# Altium PCB main.PcbDoc
Units mil, origin at the board's own origin, x right, y up, seen from the top; angles counter-clockwise.
Board outline 1328.74 x 1781.5 mil, 4 copper layers (Layer 1, Layer 2, Layer 3, Layer 4), stack 22.378 mil thick; 84 components, 60 nets, 280 pads, 40 vias.
Unrouted connection lines stored in the file: 90.
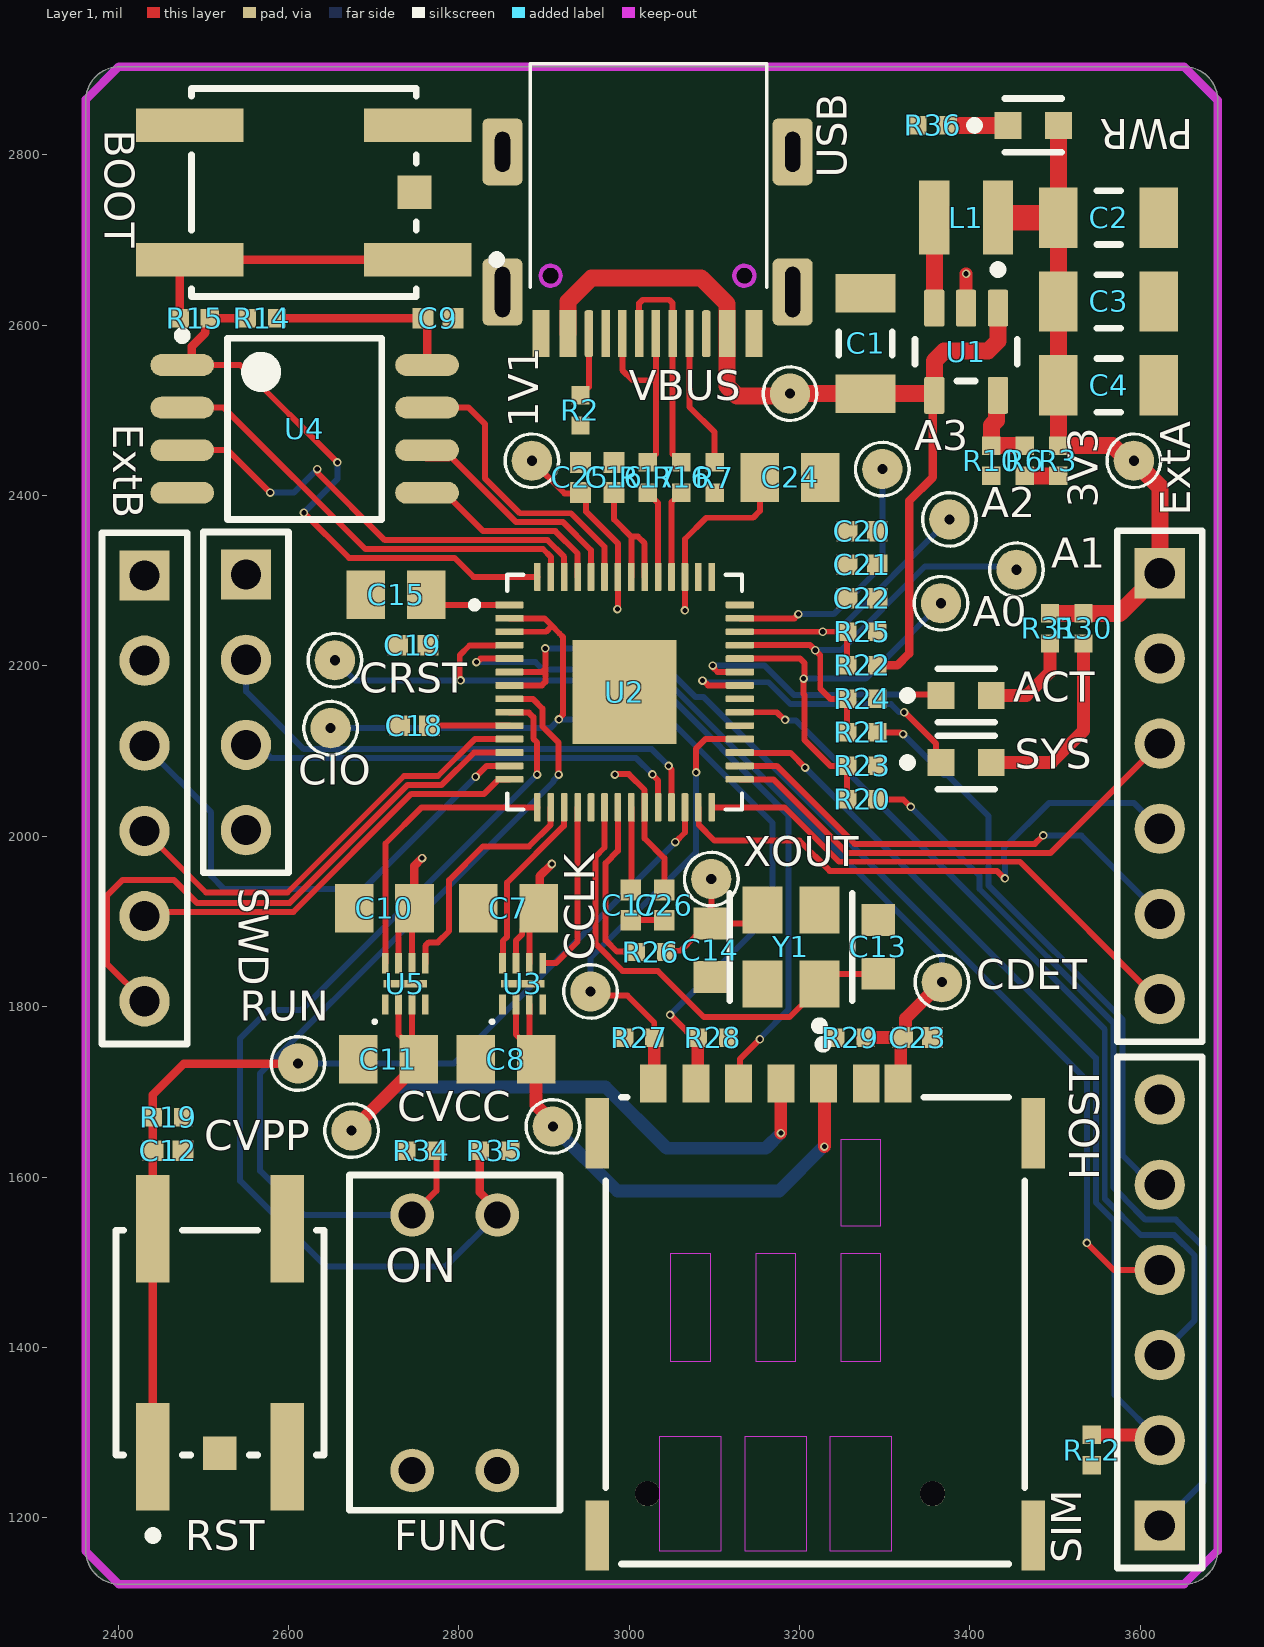
[diagram p0: Layer 1 view]
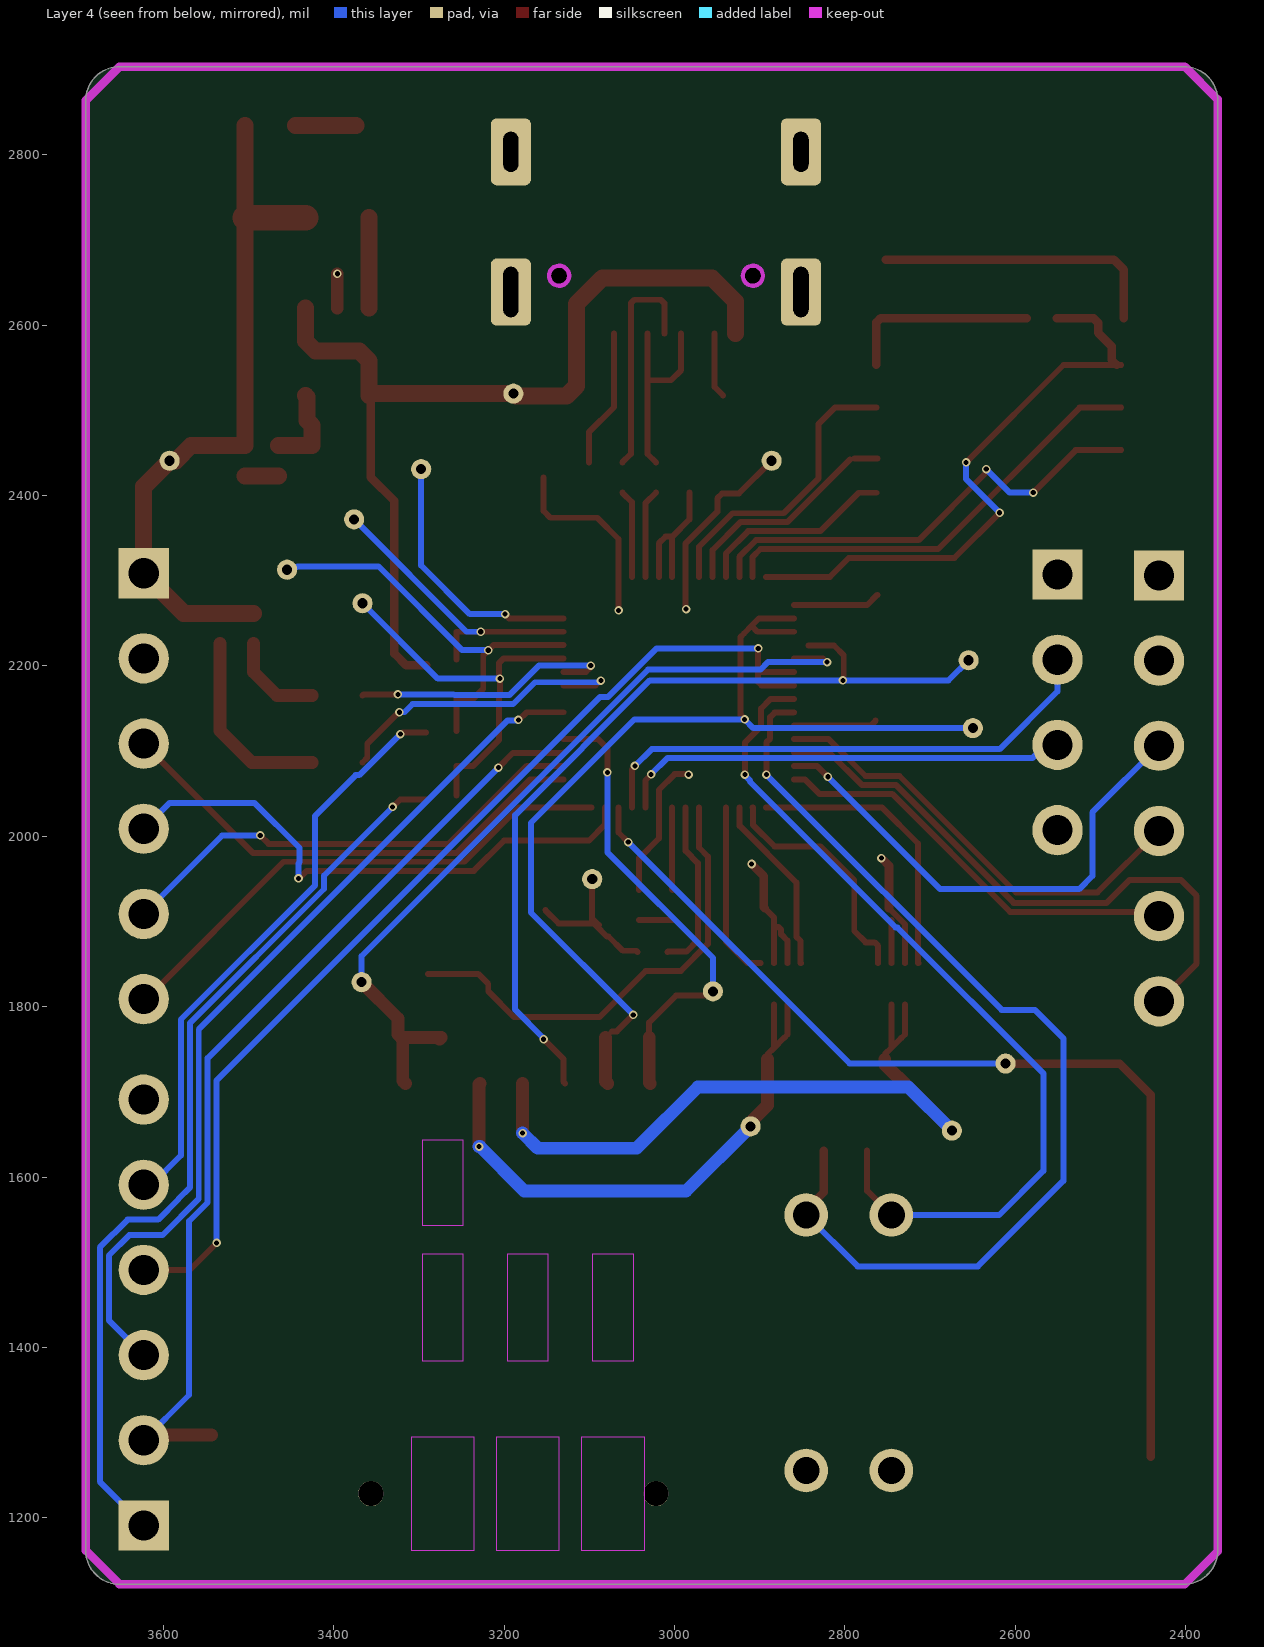
[diagram p1: Layer 4 view, seen from below]
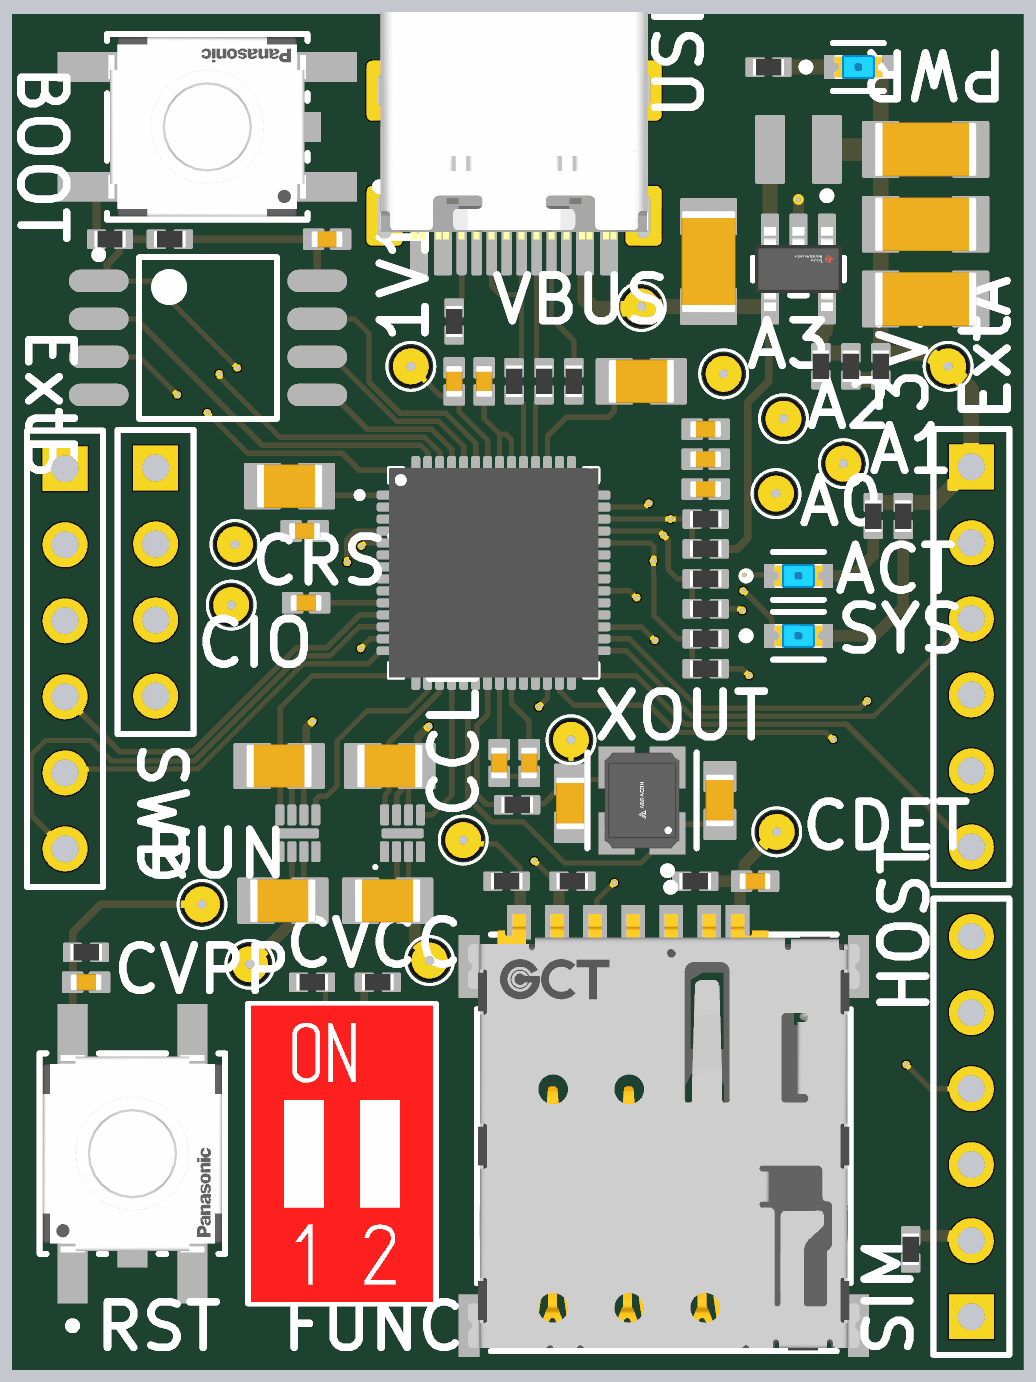
[diagram p2: 3D render of the assembled board from above, using the file's embedded part models]

## Layer stack, top to bottom
Top Solder: solder mask 0.4, Solder Resist, Dk 3.5
Layer 1: signal copper 1.4
Dielectric 2: prepreg 2.8, FR-4, Dk 4.1
Layer 2: signal copper 0.689
Dielectric 1: dielectric 12.6, FR-4, Dk 4.8
Layer 3: signal copper 0.689
Dielectric 5: prepreg 2.8, FR-4, Dk 4.1
Layer 4: signal copper 1.4
Bottom Solder: solder mask 0.4, Solder Resist, Dk 3.5

## Board outline
2362.2,1161.42 2362.2,2864.17 cw(c2401.57,2864.17) 2401.57,2903.54 3651.57,2903.54 cw(c3651.57,2864.17) 3690.94,2864.17 3690.94,1161.42 cw(c3651.57,1161.42) 3651.57,1122.05 2401.57,1122.05 cw(c2401.57,1161.42)

## Design rules (kind name [scope] priority, off if disabled: settings)
Clearance [All] p1: gap=7.87 ignorepadtopadclearanceinfootprint=TRUE except(3.5: Arc-Arc Arc-Track Track-Track; 10: Arc-Via Track-Via; 13: Arc-Hole Track-Hole SMDPad-Hole THPad-Hole Via-Hole Fill-Hole Poly-Hole Region-Hole)
DiffPairsRouting [All] p1: maxlimit=10 minlimit=3.5 mostfreqgap=10 toplayer_minwidth=3.5 toplayer_maxwidth=15 toplayer_prefwidth=15 midlayer1_minwidth=3.5 midlayer1_maxwidth=15 midlayer1_prefwidth=15 midlayer2_minwidth=3.5 midlayer2_maxwidth=15 midlayer2_prefwidth=15 bottomlayer_minwidth=3.5 bottomlayer_maxwidth=15 bottomlayer_prefwidth=15 maxuncoupledlength=500
HoleSize [All] p1: absolutevalues=TRUE maxlimit=248.03 minlimit=5.91 maxpercent=80.000 minpercent=20.000
HoleToHoleClearance [All] p1: gap=19.68 allowstackedmicrovias=TRUE
MinimumSolderMaskSliver [All] p1: minsoldermaskwidth=7.87
PasteMaskExpansion [All] p1: expansion=1.97
PlaneClearance [All] p1: clearance=7.87
PlaneConnect [All] p1: planeconnectstyle=Direct reliefexpansion=20 reliefentries=4 reliefconductorwidth=10 reliefairgap=10
PolygonConnect [All] p1: connectstyle=Direct reliefconductorwidth=10 reliefentries=4 polygonreliefangle="90 Angle" airgapwidth=10
RoutingCorners [All] p1: cornerstyle=Round minsetback=100 maxsetback=100
RoutingVias [All] p1: holewidth=10 width=20 viastyle="Through Hole" minholewidth=5.91 minwidth=9.84 maxholewidth=248.03 maxwidth=300
SilkToSilkClearance [All] p1: silktosilkclearance=0
SilkToSolderMaskClearance [IsPad] p1: minsilkscreentomaskgap=5.91 clearancetoexposedcopper=TRUE
SolderMaskExpansion [All] p1: expansion=1.97 istentingtop=FALSE
Width [All] p1: maxlimit=200 minlimit=3.5 preferedwidth=10
20 further rules are at their usual default settings.

## Classes and differential pairs
differential pair USB: +USB_P -USB_N

## Components (designator, comment, footprint, x,y, rotation, side; value= is the part's Value field where it differs from the comment)
1V1 "TestPin 1.2R 0.3R" TestPin_1.2R_0.3R 2885.83,2440.94 r0 top
3V3 "TestPin 1.2R 0.3R" TestPin_1.2R_0.3R 3592.52,2440.94 r90 top
A0 "TestPin 1.2R 0.3R" TestPin_1.2R_0.3R 3366.14,2273.62 r90 top
A1 "TestPin 1.2R 0.3R" TestPin_1.2R_0.3R 3454.72,2312.99 r90 top
A2 "TestPin 1.2R 0.3R" TestPin_1.2R_0.3R 3375.98,2372.05 r90 top
A3 "TestPin 1.2R 0.3R" TestPin_1.2R_0.3R 3297.24,2431.1 r0 top
ACT "LTST-C191TBKT" FP-LTST-C191TBKT-MFG 3395.67,2165.35 r0 top (schematic designator D2)
BOOT "EVQ-Q2H03W" FP-EVQ-Q2H03W-MFG 2618.11,2755.91 r180 top locked (schematic designator SW1)
C1 "C1206_4u7" C1206 3277.56,2578.74 r90 top locked value=4u7
C2 "C1206_10u" C1206 3562.99,2726.38 r0 top locked value=10u
C3 "C1206_10u" C1206 3562.99,2627.95 r0 top locked value=10u
C4 "C1206_10u" C1206 3562.99,2529.53 r0 top locked value=10u
C7 "C0805_1u" C0805 2858.27,1915.35 r180 top value=1u
C8 "C0805_1u" C0805 2855.32,1738.19 r180 top value=1u
C9 "C0402_100n" C0402 2775.59,2608.27 r0 top value=100n
C10 "C0805_1u" C0805 2712.6,1915.35 r180 top value=1u
C11 "C0805_1u" C0805 2717.52,1738.19 r180 top value=1u
C12 "C0402_100n" C0402 2458.66,1630.91 r0 top value=100n
C13 "C0603_15p" C0603 3292.32,1870.08 r90 top locked value=15p
C14 "C0603_15p" C0603 3095.47,1866.14 r270 top locked value=15p
C15 "C0805_1u" C0805 2726.38,2283.46 r180 top value=1u
C16 "C0402_100n" C0402 2982.28,2421.26 r90 top value=100n
C17 "C0402_100n" C0402 3001.97,1919.29 r270 top value=100n
C18 "C0402_100n" C0402 2748.03,2129.92 r180 top value=100n
C19 "C0402_100n" C0402 2746.06,2224.41 r180 top value=100n
C20 "C0402_100n" C0402 3273.62,2358.27 r0 top value=100n
C21 "C0402_100n" C0402 3273.62,2318.9 r0 top value=100n
C22 "C0402_100n" C0402 3273.62,2279.53 r0 top value=100n
C23 "C0402_100n" C0402 3338.58,1763.78 r0 top value=100n
C24 "C0805_1u" C0805 3188.98,2421.26 r0 top value=1u
C25 "C0402_100n" C0402 2942.91,2421.26 r90 top value=100n
C26 "C0402_100n" C0402 3041.34,1919.29 r270 top value=100n
CCLK "TestPin 1.2R 0.3R" TestPin_1.2R_0.3R 2954.72,1817.91 r90 top
CDET "TestPin 1.2R 0.3R" TestPin_1.2R_0.3R 3367.13,1828.74 r180 top
CIO "TestPin 1.2R 0.3R" TestPin_1.2R_0.3R 2649.61,2126.97 r180 top
CRST "TestPin 1.2R 0.3R" TestPin_1.2R_0.3R 2654.53,2206.69 r90 top
CVCC "TestPin 1.2R 0.3R" TestPin_1.2R_0.3R 2910.43,1659.45 r90 top
CVPP "TestPin 1.2R 0.3R" TestPin_1.2R_0.3R 2674.21,1654.53 r90 top
ExtA "Header 6" HDR1X6 3623.03,2308.86 r270 top locked (schematic designator P3)
ExtB "Header 6" HDR1X6 2431.1,2306.3 r270 top locked (schematic designator P4)
FUNC "418117270902" 418117270902 2795.28,1405.51 r0 top locked (schematic designator SW3)
HOST "Header 6" HDR1X6 3623.03,1190.94 r90 top locked (schematic designator P2)
L1 "252010CDMCDDS-2R2MC" INDC2520X10N 3395.67,2726.38 r0 top locked
PWR "LTST-C191TBKT" FP-LTST-C191TBKT-MFG 3474.41,2834.65 r0 top (schematic designator D5)
R2 "R0402_5k1" R0402 2942.91,2500 r270 top value=5k1
R3 "R0402_430k" R0402 3503.94,2440.94 r90 top value=430k
R6 "R0402_12k" R0402 3464.57,2440.94 r270 top value=12k
R7 "R0402_5k1" R0402 3100.39,2421.26 r270 top value=5k1
R10 "R0402_100k" R0402 3425.2,2440.94 r90 top value=100k
R12 "R0402_100k" R0402 3543.31,1279.53 r90 top value=100k
R14 "R0402" R0402 2568.9,2608.27 r180 top value=_
R15 "R0402_1k0" R0402 2490.16,2608.27 r180 top value=1k0
R16 "R0402_27R" R0402 3061.02,2421.26 r90 top value=27R
R17 "R0402_27R" R0402 3021.65,2421.26 r90 top value=27R
R19 "R0402_10k" R0402 2458.66,1670.28 r180 top value=10k
R20 "R0402_100k" R0402 3273.62,2043.31 r0 top value=100k
R21 "R0402_100k" R0402 3273.62,2122.05 r0 top value=100k
R22 "R0402_100k" R0402 3273.62,2200.79 r0 top value=100k
R23 "R0402_100k" R0402 3273.62,2082.68 r180 top value=100k
R24 "R0402_100k" R0402 3273.62,2161.42 r180 top value=100k
R25 "R0402_100k" R0402 3273.62,2240.16 r180 top value=100k
R26 "R0402_1k0" R0402 3025.59,1864.17 r180 top locked value=1k0
R27 "R0402_100k" R0402 3011.81,1763.78 r180 top value=100k
R28 "R0402_100k" R0402 3098.43,1763.78 r0 top value=100k
R29 "R0402_47k" R0402 3259.84,1763.78 r180 top value=47k
R30 "R0402_150R" R0402 3533.46,2244.09 r90 top value=150R
R31 "R0402_150R" R0402 3494.09,2244.09 r90 top value=150R
R34 "R0402_10k" R0402 2755.91,1630.91 r180 top value=10k
R35 "R0402_10k" R0402 2842.52,1630.91 r0 top value=10k
R36 "R0402_150R" R0402 3356.3,2834.65 r0 top value=150R
RST "EVQ-Q2H03W" FP-EVQ-Q2H03W-MFG 2519.69,1405.51 r90 top locked (schematic designator SW2)
RUN "TestPin 1.2R 0.3R" TestPin_1.2R_0.3R 2611.22,1733.27 r90 top
SIM "SIM8066-6-1-14-01-A" FP-SIM8066-6-1-14-01-A-MFG 3218.5,1419.68 r0 top locked (schematic designator J3)
SWD "Header 4" HDR1X4 2550.2,2307.28 r270 top locked (schematic designator P1)
SYS "LTST-C191TBKT" FP-LTST-C191TBKT-MFG 3395.67,2086.61 r0 top (schematic designator D1)
U1 "TLV62569DBVR" FP-DBV0005A-MFG 3395.67,2568.9 r270 top locked
U2 "RP2040" QFN40P700X700X90-57N 2994.69,2169.29 r0 top locked
U3 "AP7345D-1833RH4-7" SON127P600-8N 2875,1826.77 r90 top
U4 "W25Q16DVSSIG" WINB-W25Q16DVSSIG-8_M 2619.09,2478.35 r0 top locked
U5 "AP7345D-1833RH4-7" SON127P600-8N 2737.2,1826.77 r90 top
USB "Type_C_16P" Type_C_16P 3021.65,2696.85 r90 top locked (schematic designator J2)
VBUS "TestPin 1.2R 0.3R" TestPin_1.2R_0.3R 3188.98,2519.68 r90 top
XOUT "TestPin 1.2R 0.3R" TestPin_1.2R_0.3R 3096.46,1949.8 r0 top
Y1 "ABM8G-12.000MHZ-B4Y-T" FP-ABM8G-MFG 3189.96,1870.08 r90 top locked

## Footprints (in the part's own frame and the unit in brackets; to place one, negate y for a bottom-side part, rotate by r counter-clockwise, add the part's x,y. Pads: shape width x height; smd on the part's side, far side on the other; paste and mask are expansions set on the pad)
418117270902 [mm] "2.54 mm compact THT with raised actuator, 2p"
  round 1.3 hole 0.8: 1(-1.27,-3.81) 2(1.27,-3.81) 3(1.27,3.81) 4(-1.27,3.81)
  silkscreen extent -3.14,-5 3.14,5, body extent -3.04,-4.95 3.04,4.95, height 6.9
C0402 [mm]
  rect 0.62x0.62 smd: 1(-0.45,0) 2(0.45,0)
  body extent -0.53,-0.28 0.53,0.28, height 0.6
C0603 [mm]
  rect 0.95x1 smd: 1(-0.8,0) 2(0.8,0)
  body extent -0.87,-0.48 0.87,0.48, height 0.7
C0805 [mm]
  rect 1.15x1.45 smd: 1(-0.9,0) 2(0.9,0)
  body extent -1.1,-0.72 1.1,0.72, height 0.9
C1206 [mm]
  rect 1.15x1.8 smd: 1(-1.5,0) 2(1.5,0)
  silkscreen extent -0.35,-0.8 0.35,0.8, body extent -1.7,-0.9 1.7,0.9, height 1
FP-ABM8G-MFG [mm]
  rect 1.4x1.2 smd paste+0 mask+0: 1(-1.1,-0.85) 2(1.1,-0.85) 3(1.1,0.85) 4(-1.1,0.85)
  silkscreen extent -2.47,-1.83 1.6,1.83, body extent -1.9,-1.55 1.9,1.55, height 0.25
FP-DBV0005A-MFG [mm]
  rrect17% 1.1x0.6 smd paste+0 mask+0: 1(-1.3,0.95) 2(-1.3,0) 3(-1.3,-0.95) 4(1.3,-0.95) 5(1.3,0.95)
  silkscreen extent -2.57,-1.53 0.87,1.53, body extent -1.95,-1.78 1.95,1.78, height 0.25
FP-EVQ-Q2H03W-MFG [mm]
  rect 1x1 smd paste+0 mask+0: 1(-3.3,0)
  rect 3.2x1 smd paste+0 mask+0: A(-3.4,2) A'(3.4,2) B(-3.4,-2) B'(3.4,-2)
  silkscreen extent -5.88,-3.1 3.35,3.1, body extent -5.1,-3.2 5.1,3.2, height 0.25
FP-LTST-C191TBKT-MFG [mm]
  rect 0.8x0.8 smd paste+0 mask+0: 1(-0.75,0) 2(0.75,0)
  silkscreen extent -1.87,-0.8 0.85,0.8, body extent -1.25,-0.55 1.25,0.55, height 0.25
FP-SIM8066-6-1-14-01-A-MFG [mm]
  rect 0.7x2.1 smd paste+0 mask+0: 1(-6.5,5.89) 2(6.5,5.89) 3(-6.5,-6.11) 4(6.5,-6.11)
  rect 0.8x1.14 smd paste+0 mask+0: C1(0.25,7.37) C2(-2.29,7.37) C3(-4.83,7.37) C5(1.52,7.37) C6(-1.02,7.37) C7(-3.56,7.37) CD(2.47,7.37)
  round 0.75 hole 0.75 unplated paste-1000 mask+0: ""(-5,-4.86) ""(3.5,-4.86)
  Keep-Out Layer region: 0.76,3.135 1.96,3.135 1.96,5.685 0.76,5.685
  Keep-Out Layer region: 0.76,-0.915 1.96,-0.915 1.96,2.295 0.76,2.295
  Keep-Out Layer region: -1.78,-0.915 -0.58,-0.915 -0.58,2.295 -1.78,2.295
  Keep-Out Layer region: -4.32,-0.915 -3.12,-0.915 -3.12,2.295 -4.32,2.295
  Keep-Out Layer region: -4.645,-6.56 -2.795,-6.56 -2.795,-3.16 -4.645,-3.16
  Keep-Out Layer region: -2.105,-6.56 -0.255,-6.56 -0.255,-3.16 -2.105,-3.16
  Keep-Out Layer region: 0.435,-6.56 2.285,-6.56 2.285,-3.16 0.435,-3.16
  silkscreen extent -6.24,-6.96 6.24,8.66, body extent -6.95,-7.26 6.95,8.04, height 0.25
HDR1X4 [mm] "Connector; Header; 4 Position"
  rect 1.5x1.5 hole 0.9: 1(0,0)
  round 1.5 hole 0.9: 2(2.54,0) 3(5.08,0) 4(7.62,0)
  silkscreen extent -1.27,-1.27 8.89,1.27
HDR1X6 [mm] "Connector; Header; 6 Position"
  rect 1.5x1.5 hole 0.9: 1(0,0)
  round 1.5 hole 0.9: 2(2.54,0) 3(5.08,0) 4(7.62,0) 5(10.16,0) 6(12.7,0)
  silkscreen extent -1.27,-1.27 13.97,1.27
INDC2520X10N [mm] "Chip Inductor, 2-Leads, Body 2.50x2.00mm, IPC Medium Density"
  rect 0.9x2.2 smd: 1(-0.95,0) 2(0.95,0)
  body extent -1.35,-1.1 1.35,1.1, height 1
QFN40P700X700X90-57N [mm]
  rrect25% 0.84x0.2 smd: 1(-3.435,2.6) 2(-3.435,2.2) 3(-3.435,1.8) 4(-3.435,1.4) 5(-3.435,1) 6(-3.435,0.6) 7(-3.435,0.2) 8(-3.435,-0.2) 9(-3.435,-0.6) 10(-3.435,-1) 11(-3.435,-1.4) 12(-3.435,-1.8) 13(-3.435,-2.2) 14(-3.435,-2.6) 29(3.435,-2.6) 30(3.435,-2.2) 31(3.435,-1.8) 32(3.435,-1.4) 33(3.435,-1) 34(3.435,-0.6) 35(3.435,-0.2) 36(3.435,0.2) 37(3.435,0.6) 38(3.435,1) 39(3.435,1.4) 40(3.435,1.8) 41(3.435,2.2) 42(3.435,2.6)
  rrect25% 0.2x0.84 smd: 15(-2.6,-3.435) 16(-2.2,-3.435) 17(-1.8,-3.435) 18(-1.4,-3.435) 19(-1,-3.435) 20(-0.6,-3.435) 21(-0.2,-3.435) 22(0.2,-3.435) 23(0.6,-3.435) 24(1,-3.435) 25(1.4,-3.435) 26(1.8,-3.435) 27(2.2,-3.435) 28(2.6,-3.435) 43(2.6,3.435) 44(2.2,3.435) 45(1.8,3.435) 46(1.4,3.435) 47(1,3.435) 48(0.6,3.435) 49(0.2,3.435) 50(-0.2,3.435) 51(-0.6,3.435) 52(-1,3.435) 53(-1.4,3.435) 54(-1.8,3.435) 55(-2.2,3.435) 56(-2.6,3.435)
  rect 3.1x3.1 smd paste-0.57: 57(0,0)
  silkscreen extent -4.57,-3.5 3.5,3.5, body extent -3.5,-3.5 3.5,3.5, height 0.9
R0402 [mm]
  rect 0.55x0.55 smd: 1(-0.45,0) 2(0.45,0)
  body extent -0.53,-0.28 0.53,0.28, height 0.4
SON127P600-8N [mm] "X2-DFN1612-8"
  rect 0.6x0.2 smd: 1(-0.615,0.6) 2(-0.615,0.2) 3(-0.615,-0.2) 4(-0.615,-0.6) 5(0.615,-0.6) 6(0.615,-0.2) 7(0.615,0.2) 8(0.615,0.6)
  rect 0.23x1.3 smd: 9(0,0)
  silkscreen extent -1.18,0.86 -1.08,0.96, body extent -0.63,-0.83 0.63,0.82, height 0.4
TestPin_1.2R_0.3R [mm]
  round 1.2 / inner round 1.2 / far side round 0.6 hole 0.3 mask+0.102: 0(0,0)
  silkscreen extent -0.8,-0.8 0.8,0.8
Type_C_16P [mm]
  rrect30% 2x1.2 hole 0.45 slot 1.5 at 0 deg: 0(-1.47,4.325) 0(-1.47,-4.325)
  rrect30% 2x1.2 hole 0.45 slot 1.2 at 0 deg: 0(2.71,4.325) 0(2.71,-4.325)
  rect 1.397x0.5 smd: A1B12(-2.71,-3.175) A4B9(-2.71,-2.375) A9B4(-2.71,2.375) A12B1(-2.71,3.175)
  rect 1.397x0.25 smd: A5(-2.71,-1.25) A6(-2.71,-0.25) A7(-2.71,0.25) A8(-2.71,1.25) B6(-2.71,0.75) B7(-2.71,-0.75)
  rrect50% 1.397x0.25 smd: B5(-2.71,1.75) B8(-2.71,-1.75)
  Keep-Out Layer board cut-out: -0.983,-2.587 -1.098,-2.61 -1.195,-2.675 -1.26,-2.773 -1.283,-2.887 -1.283,-2.887 -1.26,-3.002 -1.195,-3.1 -1.098,-3.165 -0.983,-3.187 -0.983,-3.187 -0.868,-3.165 -0.771,-3.1 -0.706,-3.002 -0.683,-2.887 -0.683,-2.887 -0.706,-2.773 -0.771,-2.675 -0.868,-2.61 -0.983,-2.587
  Keep-Out Layer board cut-out: -0.983,3.19 -1.098,3.168 -1.195,3.103 -1.26,3.005 -1.283,2.89 -1.283,2.89 -1.26,2.776 -1.195,2.678 -1.098,2.613 -0.983,2.59 -0.983,2.59 -0.868,2.613 -0.771,2.678 -0.706,2.776 -0.683,2.89 -0.683,2.89 -0.706,3.005 -0.771,3.103 -0.868,3.168 -0.983,3.19
  Keep-Out Layer circle w0.127: c-0.983,2.89 r0.3
  Keep-Out Layer circle w0.127: c-0.983,-2.887 r0.3
  silkscreen extent -1.33,-3.55 5.34,3.5, body extent -2.27,-4.47 5.33,4.47, height 3.28
WINB-W25Q16DVSSIG-8_M [mm] "SOIC, 8-Leads, Body 5.4x5.4mm, Pitch 1.27mm, IPC Low Density"
  oval 1.9x0.65 smd: 1(-3.65,1.905) 2(-3.65,0.635) 3(-3.65,-0.635) 4(-3.65,-1.905) 5(3.65,-1.905) 6(3.65,-0.635) 7(3.65,0.635) 8(3.65,1.905)
  silkscreen extent -3.77,-2.7 2.3,2.9, body extent -2.7,-2.7 2.7,2.7, height 2.16

## Part data
ACT PWR SYS: library part CMP-22017-000008-1, "LED BLUE CLEAR CHIP SMD", Case Code (Imperial)=0603, Case Code (Metric)=1608, Color=Blue, Forward Current=20mA, Forward Voltage=3.8V, Lens Color=Colorless, Max Operating Temperature=80°C, Max Power Dissipation=75mW, Min Operating Temperature=-20°C, Package Quantity=1, Power Dissipation=76mW, Reverse Voltage=5V, Case/Package=0603, Depth=1.6mm, Dominant Wavelength=475nm, Height=0.55mm, Illumination Color=Blue, Lead Free="Lead Free", Length=0.8mm, Lens Style=Diffused, Lens Transparency=Clear, Luminous Intensity=180mcd, Mount="Surface Mount", Number of Elements=1, Number of LEDs=1, Number of Pins=2, Packaging="Tape and Reel", Radiation Hardening=No, Test Current=20mA, Viewing Angle=130°, Wavelength=468nm, Width=0.8mm
BOOT RST: library part CMP-05618-000002-1, "SWITCH TACTILE SPST-NO 0.02A 15V", Contact Current Rating=20mA, Contact Resistance=100mΩ, Manufacturer="Panasonic Electronic Components", Operating Force=1N, Package=0, Temperature="-40°C to +85°C", Temperature Range High=+85°C, Temperature Range Low=-40°C, Voltage Rating DC=15V, Automotive=No, Category=Switch, ComponentLink2Description=Datasheet, ComponentLink2URL=https://industrial.panasonic.com/ac/cdn/e/control/switch/light-touch/catalog/sw_lt_eng_6s_th.pdf, Device Class L1=Electromechanical, Device Class L2=Switches, Device Class L3="Tactile Switches", Digikey Description="SWITCH TACTILE SPST-NO 0.02A 15V", Electromechanical Life=1000000Cycles, Height=3.3mm, Lead Free=Yes, Manufacturer Part Number=EVQ-Q2H03W, Mount="Surface Mount", Mouser Description="Switch Tactile ON OFF SPST Round Button J-Bend 0.02A 15VDC 1N SMD Embossed T/R", Octopart=https://octopart.com/evq-q2h03w-panasonic-1368538, RoHS=TRUE, Throw Configuration=SPST-NO
C1: library part CMP-003-0093-1, Dielectric=X7R, Hidden Value=C475, Manufacturer 1=Kemet, Manufacturer Part Number 1=C1206C475K4RAC, Tolerance=0.1%, Voltage Rating DC=16V, Component Type=Standard, Part Number=C1206_4u7, Pin Count=2
C2 C3 C4: library part CMP-003-0097-1, Dielectric=X7R, Hidden Value=C106, Manufacturer 1=Kemet, Manufacturer Part Number 1=C1206C106K4RAC, Tolerance=0.1%, Voltage Rating DC=16V, Component Type=Standard, Part Number=C1206_10u, Pin Count=2
C7 C8 C10 C11 C15 C24: library part CMP-003-0085-1, Dielectric=X7R, Hidden Value=C105, Manufacturer 1=Kemet, Manufacturer Part Number 1=C0805C105K3RAC, Tolerance=0.1%, Voltage Rating DC=25V, Component Type=Standard, Part Number=C0805_1u, Pin Count=2
C9 C12 C16 C17 C18 C19 C20 C21 C22 C23 C25 C26: library part CMP-003-0006-1, Dielectric=X7R, Manufacturer 1=Kemet, Manufacturer Part Number 1=C0402C104K4RACTU, Tolerance=0.1%, Voltage Rating DC=16V, Component Type=Standard, Part Number=C0402_100n, Pin Count=2
C13 C14: library part CMP-003-0023-1, Dielectric=C0G, Hidden Value=C150, Manufacturer 1=Kemet, Manufacturer Part Number 1=C0603C150J1GAC, Tolerance=0.05%, Voltage Rating DC=100V, Component Type=Standard, Part Number=C0603_15p, Pin Count=2
ExtA ExtB HOST: "Header, 6-Pin", LatestRevisionDate=17-Jul-2002, LatestRevisionNote="Re-released for DXP Platform.", Publisher="Altium Limited"
FUNC: library part CMP-1435-00002-2, Current Rating=25mA, Insulation Resistance=100MΩ, Max Operating Temperature=85°C, Min Operating Temperature=-40°C, Voltage Rating=24V, Body Material="Nylon, Polyamide", Contact Plating=Gold, Electrical Life=2kcycles, Length=6.08mm, Mechanical Life=5kcycles, Mount="Through Hole", NexarPartId=22584989, Number of Pins=2, Number of Positions=2, Pitch=2.54mm, RoHS=Compliant, Termination="PC Pin", Throw Configuration=SPST, Voltage Rating (DC)=24V, Washable=No
L1: library part CMP-00003-2, "Fixed Ind 2.2UH 2.5A 97 Mohm SMD"
R2 R7: library part CMP-004-0436-1, Manufacturer 1=Vishay, Manufacturer Part Number 1=CRCW04025K10FKED, Power Rating=62,5mW, Tolerance=1%, Component Type=Standard, Part Number=R0402_5k1, Pin Count=2
R3: library part CMP-004-0482-1, Manufacturer 1=Vishay, Manufacturer Part Number 1=CRCW0402430KFKED, Power Rating=62,5mW, Tolerance=1%, Component Type=Standard, Part Number=R0402_430k, Pin Count=2
R6: library part CMP-004-0445-1, Manufacturer 1=Vishay, Manufacturer Part Number 1=CRCW040212K0FKED, Power Rating=62,5mW, Tolerance=1%, Component Type=Standard, Part Number=R0402_12k, Pin Count=2
R10 R12 R20 R21 R22 R23 R24 R25 R27 R28: library part CMP-004-0467-1, Manufacturer 1=Vishay, Manufacturer Part Number 1=CRCW0402100KFKED, Power Rating=62,5mW, Tolerance=1%, Component Type=Standard, Part Number=R0402_100k, Pin Count=2
R14: library part CMP-004-0369-1, Manufacturer 1=Vishay, Manufacturer Part Number 1=CRCW0402____FKED, Power Rating=62,5mW, Tolerance=1%, Component Type=Standard, Part Number=R0402, Pin Count=2
R15 R26: library part CMP-004-0419-1, Manufacturer 1=Vishay, Manufacturer Part Number 1=CRCW04021K00FKED, Power Rating=62,5mW, Tolerance=1%, Component Type=Standard, Part Number=R0402_1k0, Pin Count=2
R16 R17: library part CMP-004-0381-1, Manufacturer 1=Vishay, Manufacturer Part Number 1=CRCW040227R0FKED, Power Rating=62,5mW, Tolerance=1%, Component Type=Standard, Part Number=R0402_27R, Pin Count=2
R19 R34 R35: library part CMP-004-0443-1, Manufacturer 1=Vishay, Manufacturer Part Number 1=CRCW040210K0FKED, Power Rating=62,5mW, Tolerance=1%, Component Type=Standard, Part Number=R0402_10k, Pin Count=2
R29: library part CMP-004-0459-1, Manufacturer 1=Vishay, Manufacturer Part Number 1=CRCW040247K0FKED, Power Rating=62,5mW, Tolerance=1%, Component Type=Standard, Part Number=R0402_47k, Pin Count=2
R30 R31 R36: library part CMP-004-0399-1, Manufacturer 1=Vishay, Manufacturer Part Number 1=CRCW0402150RFKED, Power Rating=62,5mW, Tolerance=1%, Component Type=Standard, Part Number=R0402_150R, Pin Count=2
SIM: library part CMP-03329-117635865-1, "SIM8066-6-1-14-01-A Memory Card Connectors 1.44mm Nano SIM Conn w/Peg and Switch", Current Rating=1A, Max Operating Temperature=85°C, Min Operating Temperature=-40°C, Voltage Rating=30V, Contact Material="Gold, Nickel", NexarPartId=117635865, Number of Contacts=6, Number of Pins=6
SWD: "Header, 4-Pin", LatestRevisionDate=17-Jul-2002, LatestRevisionNote="Re-released for DXP Platform.", Publisher="Altium Limited"
U1: library part CMP-04918-000387-1, "IC REG BUCK ADJ 2A SOT23-5", Case/Package=SOT-23-5, Max Input Voltage=5.5V, Max Operating Temperature=125°C, Min Input Voltage=2.5V, Min Operating Temperature=-40°C, Min Output Voltage=600mV, Output Current=2A, Switching Frequency=1.5MHz, Max Output Voltage=5.5V, Mount="Surface Mount", Output Configuration=Positive, Output Type=Adjustable, Packaging="Cut Tape", RoHS Compliant=Yes, Synchronous Rectifier=Yes
U2: library part CMP-013-000000-1, "RP2040 chip for Raspberry Pi Pico - ARM?Cortex?M0+ MCU 32-Bit", Package=None, Check_prices=https://www.snapeda.com/parts/RP2040/Raspberry+Pi/view-part/?ref=eda, Component Type=Standard, Design Item ID=RP2040, MF="Raspberry Pi", MP=RP2040, Pin Count=57, SnapEDA_Link=https://www.snapeda.com/parts/RP2040/Raspberry+Pi/view-part/?ref=snap, Source=RP2040.SchLib
U3 U5: library part CMP-00006-1, "Active Positive e4 Fixed Linear Voltage Regulator IC -40C~85C TA 300mA 300mA 5.25V"
U4: library part CMP-2000-05434-1, "IC FLASH 16MBIT 104MHZ 8SOIC", Manufacturer=Winbond, Operating Supply Voltage (Max)=3.6V, Operating Supply Voltage (Min)=2.7V, Operating Supply Voltage (Typ)=3/3.3V, Operating Temp Range=-40Cto85C, Operating Temperature (Max)=85C, Operating Temperature (Min)=-40C, Operating Temperature Classification=Industrial, Package Type=SOICW, Program/Erase Volt (Typ)=2.7to3.6V, Supply Current=18mA, Access Time (Max)=7ns, Address Bus=24b, Boot Type=Bottom/Top, Cell Type=NOR, Datasheet URL=https://ciiva.com/datasheet-click-14728450?src=ciiva&sig=bd4f4644, Datasheet Version="Rev. D, 10/2012", Density=16777216Bit, Interface Type=Serial(SPI), Manufacturer URL=http://www.winbond.com/hq/index.html?__locale=en, Mounting=SurfaceMount, Number of Words=2M, Pin Count=8, Programmable=Yes, Rad Hardened=No, Sync/Async=Synchronous, Word Size=8b
Y1: library part CMP-27762-015546-1, "Crystal 12MHz ±30ppm (Tol) ±30ppm (Stability) 10pF FUND 120Ω 4-Pin SMD T/R", Case/Package=CSMD, ESR (Equivalent Series Resistance)=120R, Frequency=12MHz, Frequency Stability=30ppm, Load Capacitance=10pF, Max Operating Temperature=70°C, Min Operating Temperature=-20°C, Operating Frequency="12 MHz", Package Quantity=1000, Depth=2.5mm, Frequency Tolerance=30ppm, Height=1mm, Lead Free="Lead Free", Length=3.2mm, Mount="Surface Mount", Number of Pins=4, Packaging="Tape and Reel", Series=ABM8G, Termination=SMD/SMT, Tolerance=30ppm, Width=2.5mm

## Via types
v1: diameter 10, hole 6, Layer 1 to Layer 4, 40 vias

## Nets (pads, with @x,y where several pads share a name; then routed paths per layer and width w, separated by ;. In a path a pad name is that pad's centre, name@x,y a point inside that pad or via, vN(x,y) a via of type N, cw(c..) or ccw(c..) an arc to the next point about the centre after c; other vN are vias at no path point)
1V1: 1V1.0 C24.1 C25.1 C26.1 U2.23 U2.45 U2.50 | length 622.5
  Layer 1 w7: 1V1.0 2924.31,2402.46 2943.99,2402.46 2949.64,2396.82 2949.64,2381.07 2986.81,2343.9 U2.50 2986.81,2267.32 v1(2986.22,2266.73) ; v1(2983.27,2072.36) 2983.84,2072.94 2999.66,2072.94 3018.05,2054.54 3018.05,2034.31 U2.23 3018.31,1997.44 3041.34,1974.41 C26.1 ; v1(3065.55,2265.16) U2.45 3065.55,2349.02 3090.55,2374.02 3145.67,2374.02 3153.54,2381.89 C24.1
3V3: 3V3.0 C2.1 C3.1 C4.1 C9.1 C15.1 C16.1 C17.1 C18.1 C19.1 C20.1 C21.1 C22.1 ExtA.1 ExtB.1 L1.2 PWR.2 R3.2 R14.1 R19.1 R27.2 R28.2 R29.2 R30.2 R31.2 R34.2 R35.2 SWD.1 U2.1 U2.10 U2.22 U2.33 U2.42 U2.43 U2.44 U2.48 U2.49 U4.8 | length 1527.9
  Layer 1 w7: C15.1 2773.62,2271.65 U2.1 ; C18.1@2763.78,2135.83 2769.68,2129.92 U2.10 ; C16.1 2982.28,2372.05 3002.56,2351.77 ; C17.1 3002.56,1937.6 U2.22 ; U2.49 3002.56,2351.77 ; U2.48 3018.31,2343.9 3010.43,2351.77 3002.56,2351.77
  Layer 1 w10: R14.1 C9.1 2762.8,2603.35 U4.8
  Layer 1 w20: R31.2 R30.2 3575.98,2261.81 ExtA.1 3623.03,2410.43 3V3.0 3585.15,2440.94 3567.43,2458.66 R3.2 C4.1 C3.1 C2.1 PWR.2
  Layer 1 w30: L1.2 C2.1
ADC0: A0.0 R20.1 R23.2 U2.38 | length 464.7
  Layer 1 w7: U2.38 3200.79,2208.66 3205.71,2203.74 3205.71,2185.01 v1@3205.48,2184.78 ; v1(3204.91,2185.16) 3204.91,2166.96 3205.71,2166.16 3205.71,2113.19 3236.22,2082.68 R23.2 R20.1@3255.91,2047.83
  Layer 4 w7: v1(3204.91,2185.16) 3277.68,2185.16 A0.0
ADC1: A1.0 R21.1 R24.2 U2.39 | length 491.8
  Layer 1 w7: U2.39 3212.6,2224.41 v1(3218.51,2218.51) 3224.41,2212.6 3224.41,2173.23 3236.22,2161.42 R24.2 R21.1@3255.91,2123.43
  Layer 4 w7: v1(3218.51,2218.51) 3249.02,2218.51 3347.44,2316.93 3442.31,2316.93 3443.07,2316.17 3451.54,2316.17 A1.0
ADC2: A2.0 R22.1 R25.2 U2.40 | length 361.6
  Layer 1 w7: U2.40 v1(3227.36,2240.16) R25.2 R22.1@3255.91,2207.81
  Layer 4 w7: v1(3227.36,2240.16) 3244.09,2240.16 A2.0
ADC3: A3.0 U2.41 | length 306.2
  Layer 1 w7: U2.41 3193.9,2255.91 v1(3198.82,2260.83)
  Layer 4 w7: v1(3198.82,2260.83) 3240.16,2260.83 3297.24,2317.91 A3.0
CARD_CLK: CCLK.0 R27.1 SIM.C3 U2.32 | length 554.5
  Layer 1 w7: CCLK.0 2959.65,1812.99 2998.03,1812.99 3029.53,1781.5 R27.1 ; v1(3078.74,2075.04) 3078.74,2103.35 3089.57,2114.17 U2.32
  Layer 1 w15: SIM.C3 3029.53,1711.02 R27.1
  Layer 4 w7: CCLK.0 2954.72,1857.28 3078.74,1981.3 v1(3078.74,2075.04)
CARD_Det: C23.1 CDET.0 R29.1 SIM.CD U2.5 | length 946.1
  Layer 1 w7: v1(2820.68,2204.47) 2821.49,2204.47 2825.68,2208.66 U2.5
  Layer 1 w15: R29.1@3273.62,1763.78 R29.1@3275.59,1761.81 ; R29.1 C23.1@3318.9,1763.78 ; SIM.CD 3318.9,1712.99 C23.1@3318.9,1763.78 ; CDET.0 3324.63,1786.24 3324.63,1767.54 C23.1 C23.1@3318.9,1763.78
  Layer 4 w7: v1(2820.68,2204.47) 2890.18,2204.47 2898.79,2195.87 3030.77,2195.87 3367.13,1859.51 CDET.0
CARD_IO: CIO.0 R28.1 SIM.C7 U2.2 U2.3 | length 1171.6
  Layer 1 w5: R28.1@3072.53,1771.96 3073.38,1771.11 R28.1
  Layer 1 w7: U2.3 2902.56,2240.16 2909.45,2247.05 ; U2.2 2900.59,2255.91 2909.45,2247.05 ; v1(2917.66,2137.28) 2917.66,2138.1 2922.29,2142.72 2922.29,2234.21 2918.31,2238.19 2909.45,2247.05 ; v1(3048.23,1790.35) 3067.48,1771.11 R28.1@3073.38,1771.11
  Layer 1 w15: SIM.C7 3080.71,1712.2 R28.1
  Layer 4 w7: CIO.0 2907.35,2126.97 v1(2917.66,2137.28) 3046.77,2137.28 3168.31,2015.75 3168.31,1910.43 v1(3048.23,1790.35)
CARD_RST: CRST.0 SIM.C2 U2.4 | length 1023.3
  Layer 1 w7: v1(2802.17,2183.07) 2801.59,2183.64 2801.59,2185.77 2801.18,2186.18 2801.18,2212.6 2812.56,2223.97 2842.81,2223.97 ; SIM.C2 3130.42,1711.91 3130.42,1738.68 v1(3153.54,1761.81)
  Layer 4 w7: CRST.0 2678.15,2183.07 v1(2802.17,2183.07) 3028.72,2183.07 3187.01,2024.78 3187.01,1796.42 3155.04,1764.46 3155.04,1764.12 3153.54,1762.62 v1(3153.54,1761.81)
CARD_VCC: C8.1 CVCC.0 SIM.C1 U3.2 U3.3 | length 652.3
  Layer 1 w7: U3.2 2867.13,1767.33 2871.23,1763.23 2871.61,1763.23 C8.1@2882.87,1751.97 ; U3.3 C8.1@2882.87,1751.97 ; C8.1@2890.75,1744.09 C8.1@2882.87,1751.97
  Layer 1 w15: C8.1 2890.75,1684.36 2910.43,1664.67 CVCC.0 ; SIM.C1 3229.33,1708.86 v1(3229.33,1635.83)
  Layer 4 w15: CVCC.0 2986.22,1583.66 3176.18,1583.66 3228.35,1635.83 v1(3229.33,1635.83)
CARD_VPP: C11.1 CVPP.0 SIM.C6 U5.2 U5.3 | length 862.4
  Layer 1 w7: U5.2 2729.33,1767.33 2733.43,1763.23 2733.82,1763.23 C11.1@2745.08,1751.97 ; U5.3 C11.1@2745.08,1751.97 ; C11.1 2752.95,1744.09 C11.1@2745.08,1751.97
  Layer 1 w15: CVPP.0 2736.83,1717.15 2737.82,1717.15 2752.95,1732.28 C11.1 ; v1(3178.15,1651.57) 3178.15,1709.65 SIM.C6
  Layer 4 w15: CVPP.0 2725.39,1705.71 2972.44,1705.71 3044.29,1633.86 3160.43,1633.86 v1(3178.15,1651.57)
FN1: FUNC.4 R34.1 U2.8 | length 1027.4
  Layer 1 w7: FUNC.4 2773.62,1583.86 R34.1 ; U2.8 2859.89,2160.98 2887.25,2160.98 2898.16,2150.07 2898.16,2129.21 2917.32,2110.05 v1(2917.32,2072.36)
  Layer 4 w7: FUNC.4 2618.7,1555.51 2566.93,1607.28 2566.93,1721.76 2738.19,1893.02 2740.18,1893.02 2911.44,2064.29 2911.44,2065.67 2917.32,2071.55 v1(2917.32,2072.36)
FN2: FUNC.3 R35.1 U2.9 | length 1196.6
  Layer 1 w7: U2.9 2859.89,2145.23 2882.33,2145.23 2887.66,2139.9 2887.66,2114.59 2891.94,2110.31 v1(2891.94,2072.36)
  Layer 1 w10: R35.1 2824.8,1581.96 2845.28,1561.49 FUNC.3
  Layer 4 w7: FUNC.3 2784.84,1495.08 2643.7,1495.08 2543.31,1595.47 2543.31,1762.8 2576.77,1796.26 2615.84,1796.26 v1(2891.94,2072.36)
GND: BOOT.1 BOOT.B BOOT.B' C1.2 C2.2 C3.2 C4.2 C7.2 C8.2 C9.2 C10.2 C11.2 C12.2 C13.2 C14.2 C15.2 C16.2 C17.2 C18.2 C19.2 C20.2 C21.2 C22.2 C23.2 C24.2 C25.2 C26.2 ExtA.2 ExtB.2 FUNC.1 FUNC.2 HOST.6 R2.2 R7.2 R10.1 R12.1 R23.1 R24.1 R25.1 R36.1 RST.1 RST.B RST.B' SIM.1 SIM.2 SIM.3 SIM.4 SIM.C5 SWD.4 U1.2 U2.19 U2.57 U3.1 U3.4 U3.9 U4.4 U5.1 U5.4 U5.9 USB.0 USB.A1B12 USB.A12B1 Y1.2 Y1.4 | length 79.7
  Layer 1 w7: C17.2 C26.2
  Layer 1 w15: U1.2 v1(3395.67,2660.43)
HOST_CLK: HOST.3 U2.34 | length 1048.6
  Layer 1 w7: U2.34 3173.38,2145.67 3182.37,2136.68 v1(3183.18,2136.68)
  Layer 4 w7: v1(3183.18,2136.68) 3183.75,2136.11 3195.77,2136.11 3558.4,1773.48 3558.4,1574.47 3601.03,1531.85 3639.97,1531.85 3663.93,1507.89 3663.93,1431.85 HOST.3
HOST_IO: HOST.4 U2.6 U2.7 | length 1262.6
  Layer 1 w7: U2.7 2897.47,2177.17 2901.57,2181.27 2901.57,2197.01 ; U2.6 2897.47,2192.91 2901.57,2197.01 ; v1(2901.57,2220.66) 2901.57,2197.01 ; v1(3537.4,1522.64) 3569.09,1490.94 HOST.4
  Layer 4 w7: v1(2901.57,2220.66) 3020.83,2220.66 3078.09,2163.4 3087.59,2163.4 3537.4,1713.58 v1(3537.4,1522.64)
HOST_RST: HOST.2 R12.2 U2.31 | length 1128.7
  Layer 1 w7: U2.31 3130.36,2097.99 3145.3,2097.99 3189.41,2097.99 v1(3206.69,2080.71)
  Layer 1 w15: R12.2 3616.73,1297.24 HOST.2
  Layer 4 w7: v1(3206.69,2080.71) 3547.9,1739.5 3547.9,1570.12 3569.89,1548.13 3569.89,1542.33 ; 3569.88,1542.32 3569.88,1344.09 HOST.2
HOST_VCC: HOST.1 R20.2 | length 1071.2
  Layer 1 w7: R20.2 3321.85,2043.31 v1(3330.71,2034.45)
  Layer 4 w7: v1(3330.71,2034.45) 3411.28,1953.88 3411.28,1938.22 3568.9,1780.59 3568.9,1587.59 3582.13,1574.37 3582.13,1574 3606.09,1550.04 3641.89,1550.04 3674.43,1517.5 3674.43,1242.35 HOST.1
HOST_VPP: HOST.5 R21.2 | length 692.9
  Layer 1 w7: R21.2 3318.88,2122.05 3320.94,2119.98 v1(3321.76,2119.98)
  Layer 4 w7: v1(3321.76,2119.98) 3369.99,2071.75 3374.12,2071.75 3421.78,2024.09 3421.78,1942.57 3579.4,1784.94 3579.4,1625.32 3613.78,1590.94 HOST.5
LED1: SYS.1 U2.36 | length 375.7
  Layer 1 w7: v1(3086.17,2182.9) 3086.98,2182.9 3092.71,2177.17 U2.36 ; v1(3322.83,2145.67) 3323.65,2145.67 3360.55,2108.76 3360.55,2092.2 SYS.1
  Layer 4 w7: v1(3086.17,2182.9) 3086.98,2182.9 3088.48,2181.4 3089.66,2181.4 3090.16,2180.89 3163.68,2180.89 3189.41,2155.16 3307.42,2155.16 3316.91,2145.67 v1(3322.83,2145.67)
LED2: ACT.1 U2.37 | length 319.1
  Layer 1 w7: v1(3098.24,2200.39) 3098.81,2199.82 3098.81,2197.83 3103.73,2192.91 U2.37 ; v1(3324.57,2166.6) 3364.9,2166.6 ACT.1
  Layer 4 w7: v1(3098.24,2200.39) 3159.03,2200.39 3193.76,2165.66 3258.29,2165.66 3259.23,2166.6 v1(3324.57,2166.6)
NetC14_1: C14.1 R26.1 XOUT.0 Y1.3 | length 193.5
  Layer 1 w7: R26.1 3044.79,1865.65 3060.53,1865.65 3077.32,1882.44 3079.29,1882.44 3092.52,1895.67 3092.52,1897.64 C14.1 ; C14.1@3088.58,1895.67 C14.1@3096.46,1903.54 ; XOUT.0 C14.1@3096.46,1903.54 ; Y1.3@3151.57,1913.39 3135.83,1897.64 C14.1 ; C14.1 3096.46,1898.62 C14.1@3096.46,1903.54
NetD1_2: R30.1 SYS.2 | length 226.1
  Layer 1 w15: SYS.2 3496.06,2086.61 3533.46,2124.02 R30.1
NetD2_2: ACT.2 R31.1 | length 113.8
  Layer 1 w15: ACT.2 3466.54,2165.35 3494.09,2192.91 R31.1
NetD5_1: PWR.1 R36.2 | length 70.9
  Layer 1 w20: R36.2 PWR.1
NetJ2_A5: R7.1 USB.A5 | length 163.4
  Layer 1 w7: USB.A5 3070.87,2503.94 3100.39,2474.41 R7.1
NetJ2_B5: R2.1 USB.B5 | length 76.5
  Layer 1 w7: R2.1 2952.76,2527.56 USB.B5
NetL1_1: L1.1 U1.3 | length 106.3
  Layer 1 w20: U1.3 L1.1
NetR3_1: R3.1 R6.2 | length 39.4
  Layer 1 w20: R6.2 R3.1
NetR6_1: R6.1 R10.2 U1.5 | length 101.7
  Layer 1 w20: U1.5 3431.26,2515.91 3431.26,2488.35 3425.43,2482.51 3425.43,2458.89 R10.2 R6.1
NetR16_1: R16.1 U2.46 | length 103.7
  Layer 1 w7: U2.46 3049.8,2392.32 R16.1
NetR17_1: R17.1 U2.47 | length 104.2
  Layer 1 w7: R17.1 3034.06,2391.14 U2.47
QSPI_SCK: U2.52 U4.6 | length 264.4
  Layer 1 w7: U4.6@2761.81,2443.5 U4.6@2788.78,2443.5 ; U4.6@2793.56,2442.66 2867.45,2368.77 2922.57,2368.77 2955.32,2336.02 U2.52
QSPI_SD0: U2.53 U4.5 | length 233.8
  Layer 1 w7: U4.5 2783.66,2403.35 2828.74,2358.27 2913.39,2358.27 2939.57,2332.09 U2.53
QSPI_SD1: U2.55 U4.2 | length 528.9
  Layer 1 w7: U4.2 2524.21,2503.35 2690.29,2337.27 2898.95,2337.27 2908.07,2328.15 U2.55
QSPI_SD2: U2.54 U4.3 | length 549.1
  Layer 1 w7: U4.3 2528.94,2453.35 v1(2578.74,2403.54) ; v1(2633.87,2431.11) 2633.86,2427.17 2713.26,2347.77 2904.2,2347.77 2923.82,2328.15 U2.54
  Layer 4 w7: v1(2578.74,2403.54) 2606.3,2403.54 v1(2633.87,2431.11)
QSPI_SD3: U2.51 U4.7 | length 348.8
  Layer 1 w7: U4.7 2811.61,2503.35 2830.71,2484.25 2830.71,2420.36 2871.8,2379.27 2931.76,2379.27 2971.06,2339.96 U2.51
QSPI_SS: R14.2 R15.1 U2.56 U4.1 | length 719.7
  Layer 1 w7: U4.1 2480.8,2553.35 2543.11,2553.35 v1(2657.48,2438.98) ; v1(2618.11,2379.92) 2671.26,2326.77 2795.28,2326.77 2817.52,2304.53 U2.56
  Layer 1 w10: U4.1@2480.8,2553.35 2486.7,2559.25 2486.7,2575.28 2502.35,2590.93 2502.35,2602.74 R15.1 R14.2
  Layer 4 w7: v1(2618.11,2379.92) 2657.48,2419.29 v1(2657.48,2438.98)
RUN: C12.1 R19.2 RST.A RST.A' RUN.0 U2.26 | length 1206.8
  Layer 1 w7: v1(3054.13,1993.11) 3065.55,2004.53 U2.26
  Layer 1 w10: RST.A RST.A' C12.1 R19.2 2440.94,1696.85 2477.36,1733.27 RUN.0
  Layer 4 w7: RUN.0 2794.29,1733.27 v1(3054.13,1993.11)
SPI0_CS: ExtA.6 U2.28 | length 619.3
  Layer 1 w7: U2.28 3182.48,2034.06 3246.39,1970.14 3458.89,1970.14 3620.17,1808.86 ExtA.6
SPI0_MISO: ExtA.4 U2.27 | length 659.6
  Layer 1 w7: U2.27@3081.74,2033.62 3081.74,2013.38 3100.04,1995.08 3199.8,1995.08 3235.4,1959.49 3431.62,1959.49 3440.47,1950.64 v1(3441.28,1950.64)
  Layer 4 w7: v1(3441.28,1950.64) 3441.28,1968.32 3439.96,1969.64 3439.96,1986.22 3493.11,2039.37 3592.52,2039.37 ExtA.4
SPI0_MOSI: ExtA.5 U2.30 | length 573.3
  Layer 1 w7: U2.30 3173.23,2082.68 3264.76,1991.14 3476.38,1991.14 v1(3486.22,2000.98)
  Layer 4 w7: v1(3486.22,2000.98) 3530.91,2000.98 ExtA.5
SPI0_SCK: ExtA.3 U2.29 | length 582
  Layer 1 w7: U2.29 3169.29,2066.93 3255.58,1980.64 3494.81,1980.64 ExtA.3
SPI1_CS: ExtB.6 U2.12 | length 706.8
  Layer 1 w7: ExtB.6 2386.81,1850.59 2386.81,1930.12 2405.51,1948.82 2465.55,1948.82 2492.45,1921.92 2601.61,1921.92 2740.06,2060.37 2779.94,2060.37 2818,2098.43 U2.12
SPI1_MISO: ExtB.4 U2.11 | length 532.9
  Layer 1 w7: ExtB.4 2503.35,1934.06 2598.9,1934.06 2735.71,2070.87 2775.59,2070.87 2818.9,2114.17 U2.11
SPI1_MOSI: ExtB.5 U2.14 | length 494.9
  Layer 1 w7: ExtB.5 2436.22,1911.42 2605.96,1911.42 2744.41,2049.87 2829.79,2049.87 2846.41,2066.49 2859.01,2066.49 U2.14
SPI1_SCK: ExtB.3 U2.13 | length 601.7
  Layer 1 w7: v1(2819.88,2069.88) 2832.68,2082.68 U2.13
  Layer 4 w7: ExtB.3 2509.3,2028.11 2509.3,1953.47 2524.77,1937.99 2687.99,1937.99 v1(2819.88,2069.88)
SWCLK: SWD.3 U2.24 | length 533
  Layer 1 w7: v1(3027.43,2072.74) 3027.43,2072.11 3034.06,2065.49 U2.24
  Layer 4 w7: SWD.3 2564.28,2107.28 2579.7,2091.86 3008.31,2091.86 v1(3027.43,2072.74)
SWD: SWD.2 U2.25 | length 619.4
  Layer 1 w7: v1(3046.26,2082.68) 3046.26,2081.87 3049.8,2078.32 U2.25
  Layer 4 w7: SWD.2 2550.2,2170.28 2618.11,2102.36 3026.57,2102.36 v1(3046.26,2082.68)
USB_BOOT: BOOT.A BOOT.A' R15.2 | length 341.5
  Layer 1 w10: R15.2 2472.44,2665.35 BOOT.A' BOOT.A
USB_N: R16.2 USB.A7 USB.B7 | length 269.4
  Layer 1 w7: USB.A7 3011.81,2625.82 3015.91,2629.92 3047.08,2629.92 3051.18,2625.82 3051.18,2448.82 R16.2
USB_P: R17.2 USB.A6 USB.B6 | length 242.4
  Layer 1 w7: USB.B6 2992.13,2547.24 3003.94,2535.43 3031.5,2535.43 ; R17.2 3031.5,2448.82 3031.5,2535.43 ; USB.A6 3031.5,2535.43
VBUS: C1.1 C7.1 C10.1 R22.2 U1.1 U1.4 U3.6 U3.7 U5.6 U5.7 USB.A4B9 USB.A9B4 VBUS.0 | length 1483.4
  Layer 1 w7: U5.7 2729.33,1896.65 C10.1 ; U5.6 C10.1@2745.08,1901.57 ; U3.7 2867.13,1877.53 2874.56,1884.97 2874.56,1890.31 2877.53,1893.28 C7.1@2882.87,1893.28 ; U3.6 C7.1@2882.87,1893.28 ; C7.1 2882.87,1904.53 C7.1@2882.87,1893.28
  Layer 1 w10: C10.1 2748.03,1965.55 v1(2756.89,1974.41) ; C7.1 2894.97,1916.62 2894.97,1953.04 v1(2909.45,1967.52) ; R22.2 3314.96,2200.79 3328.74,2214.57 3328.74,2393.7 3356.46,2421.42 U1.4@3356.46,2519.69
  Layer 1 w20: USB.A9B4 2928.15,2627.95 2955.71,2655.51 3084.65,2655.51 3115.16,2625 3115.16,2528.45 3126.87,2516.73 3186.02,2516.73 VBUS.0 C1.1 3356.46,2519.69 U1.4@3358.27,2517.87 ; U1.4 U1.4@3358.27,2517.87 ; U1.1 3433.07,2581.6 3421.36,2569.88 3369.98,2569.88 3358.27,2558.17 U1.4@3358.27,2517.87
VCC_1V8_EN: U2.17 U3.8 | length 213.1
  Layer 1 w7: U3.8 2851.82,1851.42 2851.82,1877.07 2856.85,1882.1 2856.85,1945.77 2923.38,2012.3 2923.38,2018.67 2923.38,2033.62 U2.17
VCC_3V3_EN: U2.18 U3.5 | length 209
  Layer 1 w7: U3.5 2899.02,1851.38 2914.37,1851.38 2939.57,1876.57 U2.18
VPP_1V8_EN: U2.15 U5.8 | length 336.7
  Layer 1 w7: U5.8 2714.02,1851.42 2714.02,1882.1 2714.02,1991.58 2756.5,2034.06 U2.15
VPP_3V3_EN: U2.16 U5.5 | length 281.8
  Layer 1 w7: U5.5 2760.83,1871.34 2764.93,1875.44 2775.38,1875.44 2788.82,1888.88 2788.82,1948.61 2828.4,1988.19 2882.44,1988.19 2907.82,2013.57 2907.82,2033.8 U2.16
XIN: C13.1 U2.20 Y1.1 | length 553.2
  Layer 1 w7: U2.20 2971.06,1986.81 2960.63,1976.38 2960.63,1873.68 2992.34,1841.97 3033.67,1841.97 3087.81,1787.84 3188.43,1787.84 3218.5,1817.91 3218.5,1826.77 Y1.1@3230.32,1838.58 ; Y1.1@3232.28,1838.58 C13.1@3289.37,1838.58
XOUT: R26.2 U2.21 | length 203.2
  Layer 1 w7: U2.21 2986.81,1982.87 2972.44,1968.5 2972.44,1877.95 2985.73,1864.67 3007.38,1864.67 R26.2
pads on no net: SIM. U2.35 USB.A8 USB.B8

## Keep-outs
Keep-Out Layer:
  lines w10: 2400.59,1122.05 2362.2,1160.43 2362.2,2865.16 2400.59,2903.54 3651.57,2903.54 3690.94,2864.17 3690.94,1161.42 3651.57,1122.05 2401.57,1122.05

## Silkscreen, mask and mechanical layers (free items; w line width, h text height)
Mechanical 1:
  lines w10: 2362.2,1161.42 ccw(c2401.57,1161.42) 2401.57,1122.05 3651.57,1122.05 ccw(c3651.57,1161.42) 3690.94,1161.42 3690.94,2864.17 ccw(c3651.57,2864.17) 3651.57,2903.54 2401.57,2903.54 ccw(c2401.57,2864.17) 2362.2,2864.17 2362.2,1162.4 ; 2362.2,1169.29 2362.2,1169.29

## Text inside footprints (layer, text, board x,y; h text height)
FUNC: Top Overlay "ON" at 2713.78,1476.38 h40; Top Component Outline "1" at 2736.22,1295.28 h40; Top Component Outline "ON" at 2713.78,1476.38 h40; Top Component Outline "2" at 2830.71,1295.28 h40